# EAGLE board Sensor_Ilham Widyo Nugroho (Line Follower) (EAGLE 7.3.0)
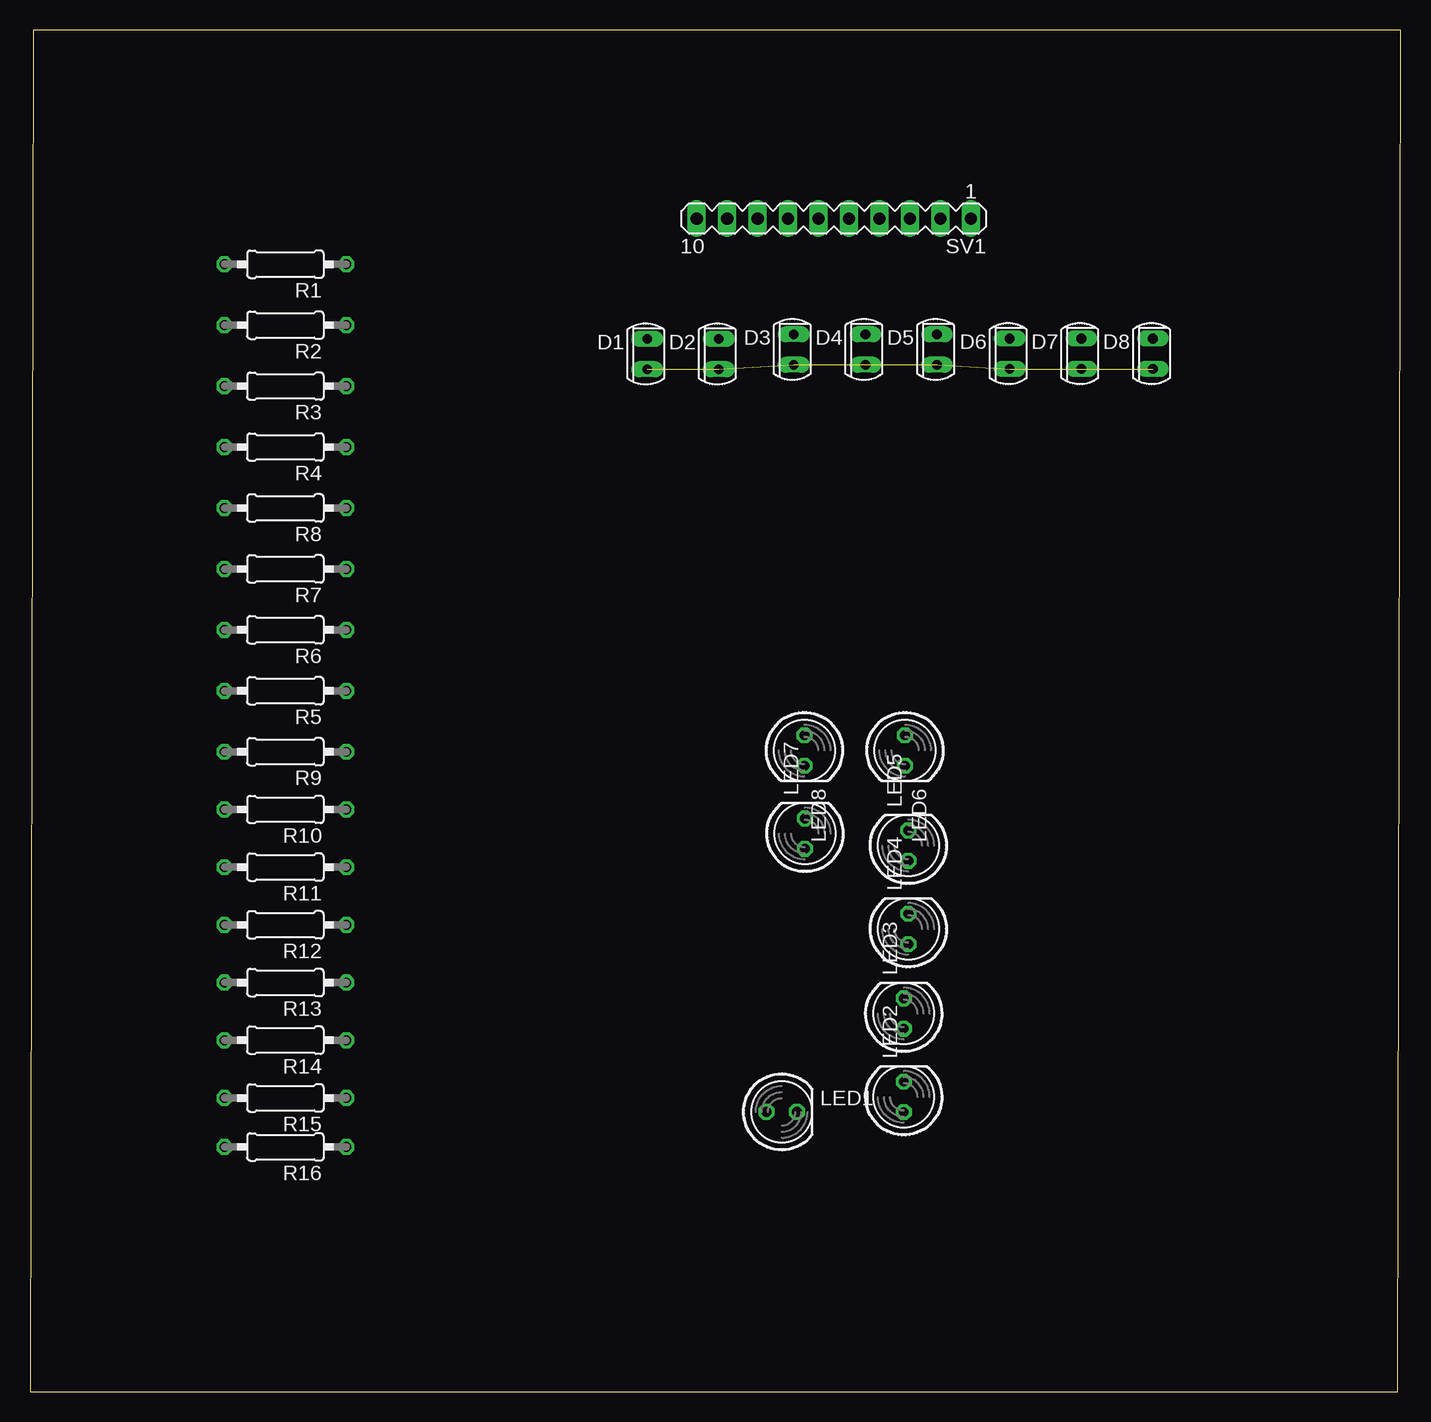
[diagram p0: board, top side]
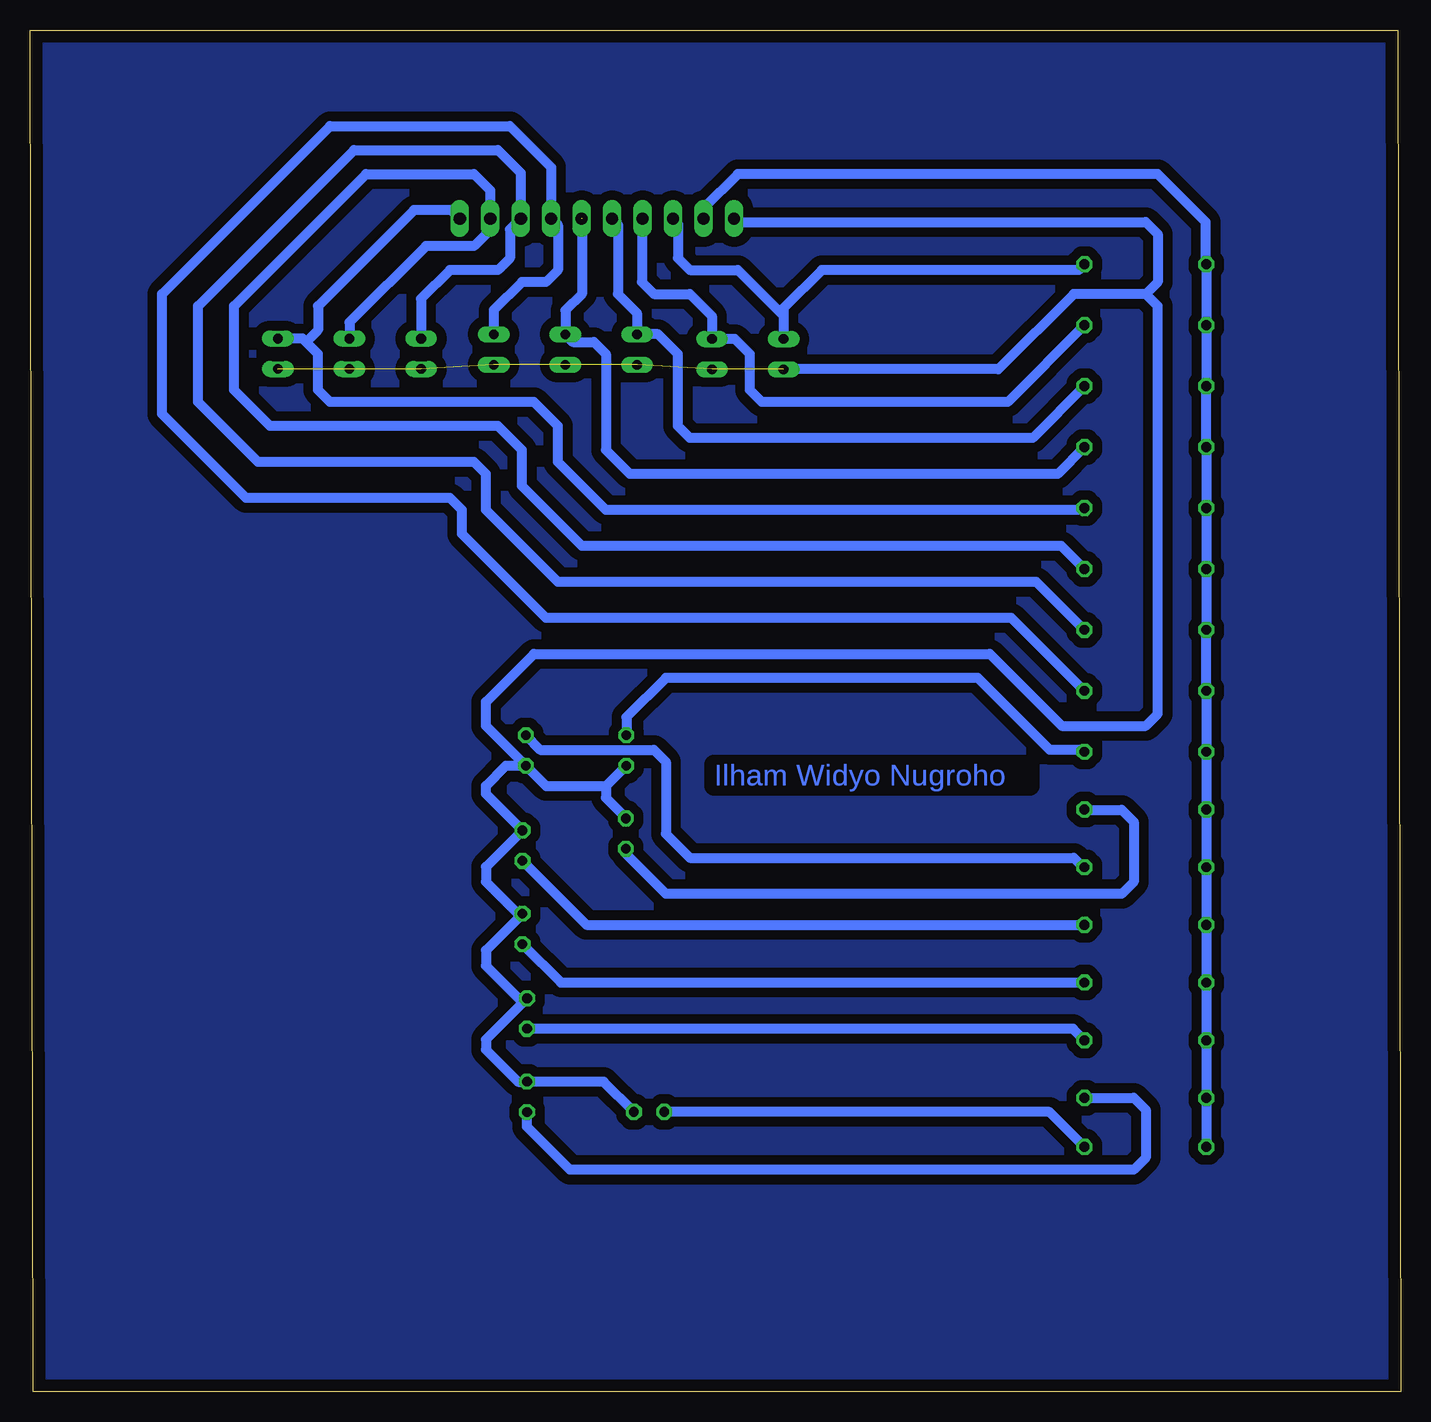
[diagram p1: board, bottom side, seen from below]

Size 114.27 x 113.51 mm. Coordinates in mm from the lower left corner, seen from the top.
Outline: 0,0 114,0 114.27,113.51 0.27,113.51 0,0
Copper layers (1*16): Top 0.035mm / dielectric 1.5mm / Bottom 0.035mm
Design rules "default": minimum track width 6mil, minimum drill 0.35mm, track to track 6mil, track to pad 6mil, pad to pad 6mil, via to via 6mil, smd to smd 6mil, copper to edge 40mil, drill to drill 6mil, minimum pad ring 10mil, minimum via ring 8mil, stop-mask expansion 4mil, vias tented up to drill 0mil, thermal gap 10mil

## Footprints (pad centres in the part's own frame; a part is rotated, then mirrored left to right if it is on the bottom)
SFH225 = drill 0.813 long: A 0,1.27; K 0,-1.27
LED5MM = drill 0.813 octagon: A -1.27,0; K 1.27,0
0207/10 = drill 0.813 octagon: 1 -5.08,0; 2 5.08,0
MA10-1 = drill 1.016 long: 1 -11.43,0; 2 -8.89,0; 3 -6.35,0; 4 -3.81,0; 5 -1.27,0; 6 1.27,0; 7 3.81,0; 8 6.35,0; 9 8.89,0; 10 11.43,0

## Placement (x,y rotation side)
D1  PhotoDioda  [SFH225]  51.45,86.49 180 top
D2  PhotoDioda  [SFH225]  57.42,86.49 180 top
D3  PhotoDioda  [SFH225]  63.67,86.87 180 top
D4  PhotoDioda  [SFH225]  69.64,86.87 180 top
D5  PhotoDioda  [SFH225]  75.61,86.87 180 top
D6  PhotoDioda  [SFH225]  81.67,86.52 180 top
D7  PhotoDioda  [SFH225]  87.64,86.52 180 top
D8  PhotoDioda  [SFH225]  93.61,86.52 180 top
LED1  LED putih SB  [LED5MM]  62.66,23.32 0 top
LED2  LED putih SB  [LED5MM]  72.84,24.57 90 top
LED3  LED putih SB  [LED5MM]  72.84,31.52 90 top
LED4  LED putih SB  [LED5MM]  73.22,38.57 90 top
LED5  LED putih SB  [LED5MM]  73.22,45.52 90 top
LED6  LED putih SB  [LED5MM]  72.94,53.45 270 top
LED7  LED putih SB  [LED5MM]  64.6,46.52 90 top
LED8  LED putih SB  [LED5MM]  64.56,53.45 270 top
R1  [0207/10]  21.29,93.98 180 top
R2  [0207/10]  21.29,88.9 180 top
R3  [0207/10]  21.29,83.82 180 top
R4  [0207/10]  21.29,78.74 180 top
R5  [0207/10]  21.29,58.42 180 top
R6  [0207/10]  21.29,63.5 180 top
R7  [0207/10]  21.29,68.58 180 top
R8  [0207/10]  21.29,73.66 180 top
R9  330  [0207/10]  21.29,53.34 180 top
R10  330  [0207/10]  21.29,48.53 180 top
R11  330  [0207/10]  21.29,43.72 180 top
R12  330  [0207/10]  21.29,38.91 180 top
R13  330  [0207/10]  21.29,34.1 180 top
R14  330  [0207/10]  21.29,29.29 180 top
R15  330  [0207/10]  21.29,24.48 180 top
R16  330  [0207/10]  21.29,20.4 180 top
SV1  [MA10-1]  67.01,97.79 180 top

## Library data of the parts
D1-D8 = opto-trans-siemens
LED1-LED8 = led
R1-R16 = resistor
SV1 = con-lstb

## Nets
GND: D1.A D2.A D3.A D4.A D5.A D6.A D7.A D8.A LED1.K LED2.K LED3.K LED4.K LED5.K LED6.K LED7.K LED8.K SV1.10
N$1: LED7.A R10.1
N$2: D7.K R7.1 SV1.2
N$3: D8.K R8.1 SV1.1
N$4: D1.K R1.1 SV1.8
N$5: D2.K R2.1 SV1.7
N$6: D3.K R3.1 SV1.6
N$7: D5.K R5.1 SV1.4
N$8: D4.K R4.1 SV1.5
N$9: D6.K R6.1 SV1.3
N$10: LED6.A R11.1
N$11: LED5.A R12.1
N$12: LED4.A R13.1
N$13: LED3.A R14.1
N$14: LED2.A R15.1
N$15: LED1.A R16.1
N$16: LED8.A R9.1
VCC: R1.2 R2.2 R3.2 R4.2 R5.2 R6.2 R7.2 R8.2 R9.2 R10.2 R11.2 R12.2 R13.2 R14.2 R15.2 R16.2 SV1.9

## Tracks (layer width: path | path; a pad name or v marks a point on that pad's centre or on a via)
GND  (7 unrouted)
  Bottom 0.813: SV1.10 55.3,97.51 21.27,97.51 20.27,96.51 20.27,92.51 21.27,91.51 | 21.27,91.51 27.27,91.51 33.56,85.22 D1.A | LED1.K 66.45,25.84 LED2.K 73.6,25.84 76.27,28.51 76.27,29.36 LED3.K 73.55,32.79 76.27,35.51 76.27,36.79 LED4.K 73.6,39.84 76.27,42.51 76.27,43.74 LED5.K 76.27,49.84 76.27,50.51 74.6,52.18 LED6.K | LED6.K 76.27,55.51 76.27,57.51 72.27,61.51 34.27,61.51 28.27,55.51 21.27,55.51 20.27,56.51 20.27,90.51 21.27,91.51 | LED8.K 66.27,50.47 | 66.27,50.47 66.27,49.51 64.6,47.84 LED7.K | LED6.K 71.23,50.47 66.27,50.47
N$1
  Bottom 0.813: R10.1 26.35,48.51 23.27,48.51 22.27,47.51 22.27,42.51 23.27,41.51 61.27,41.51 64.6,44.84 LED7.A
N$2
  Bottom 0.813: D7.K 87.64,89.14 81.27,95.51 77.27,95.51 76.27,96.51 76.27,97.42 SV1.2 75.9,100.14 77.27,101.51 86.27,101.51 97.27,90.51 97.27,83.51 94.27,80.51 75.27,80.51 73.27,78.51 73.27,75.51 68.27,70.51 28.3,70.51 R7.1
N$3
  Bottom 0.813: R8.1 26.52,73.51 66.27,73.51 70.27,77.51 70.27,80.51 72.27,82.51 89.27,82.51 90.27,83.51 90.27,86.51 91.27,87.51 | 91.27,87.51 91.55,87.79 D8.K | 91.27,87.51 90.27,88.51 90.27,90.51 82.27,98.51 79.16,98.51 SV1.1
N$4
  Bottom 0.813: R1.1 26.84,93.51 48.27,93.51 51.45,90.33 51.45,89.69 | D1.K 51.45,89.51 51.45,89.69 | SV1.8 60.27,97.4 60.27,94.51 59.27,93.51 55.27,93.51 51.45,89.69
N$5
  Bottom 0.813: R2.1 32.76,82.51 53.27,82.51 54.27,83.51 54.27,86.51 55.52,87.76 D2.K 57.42,89.66 59.27,91.51 62.27,91.51 63.27,92.51 63.27,97.72 SV1.7
N$6
  Bottom 0.813: R3.1 30.68,79.51 59.27,79.51 60.27,80.51 60.27,86.51 61.9,88.14 D3.K 63.67,89.91 65.27,91.51 65.27,97.32 SV1.6
N$7
  Bottom 0.813: D5.K 75.61,90.17 73.27,92.51 71.27,92.51 70.27,93.51 70.27,97.24 SV1.4 70.82,102.06 74.27,105.51 89.27,105.51 103.27,91.51 103.27,81.51 96.27,74.51 79.27,74.51 78.27,73.51 78.27,71.51 71.27,64.51 32.46,64.51 26.46,58.51
  Bottom 1.016: 26.46,58.51 R5.1
N$8  (1 unrouted)
  Bottom 0.813: SV1.5 68.27,91.51 69.64,90.14 D4.K 69.01,87.51 67.27,87.51 66.27,86.51 66.27,78.51 64.27,76.51 28.6,76.51 R4.1
N$9
  Bottom 0.813: D6.K 81.67,91.11 79.27,93.51 75.27,93.51 74.27,94.51 74.27,96.88 SV1.3 73.36,101.6 75.27,103.51 87.27,103.51 100.27,90.51 100.27,82.51 95.27,77.51 77.27,77.51 76.27,76.51 76.27,73.51 70.27,67.51 30.38,67.51 R6.1
  Bottom 1.016: 26.27,63.51 26.28,63.5 R6.1
N$10
  Bottom 0.813: LED6.A 71.73,53.51 62.27,53.51 61.27,52.51 61.27,46.51 59.27,44.51 27.27,44.51 26.48,43.72 R11.1
N$11
  Bottom 0.813: LED5.A 67.88,38.91 R12.1
N$12
  Bottom 0.813: LED4.A 70.02,34.1 R13.1
N$13
  Bottom 0.813: R14.1 27.33,30.25 LED3.A
N$14
  Bottom 0.813: R15.1 26.34,24.51 22.27,24.51 21.27,23.51 21.27,19.51 22.27,18.51 69.27,18.51 72.84,22.08 LED2.A
N$15
  Bottom 0.813: R16.1 29.29,23.32 LED1.A
N$16
  Bottom 0.813: R9.1 26.54,53.51 29.27,53.51 35.27,59.51 61.27,59.51 64.56,56.22 LED8.A
S$1
  pour Bottom (isolate 0.813): 0.27,113.51 0.27,-0.49 114.27,-0.49 114.27,0.51 114.27,113.51
VCC
  Bottom 0.813: R2.2 R1.2 16.27,94.04 16.27,97.51 20.27,101.51 55.27,101.51 58.12,98.66 SV1.9 | 16.27,88.84 16.21,88.84 R3.2 R4.2 R8.2 R7.2 R6.2 R5.2 R9.2 R10.2 R11.2 R12.2 R13.2 R14.2 R15.2 R16.2
  Bottom 1.016: R2.2 16.27,88.84 | 16.27,83.88 R3.2

## Text on the board
Bottom: Ilham Widyo Nugroho | Ilham Widyo Nugroho